# EAGLE board darwin-upper-panel (EAGLE 9.5.2), part 1 of 2
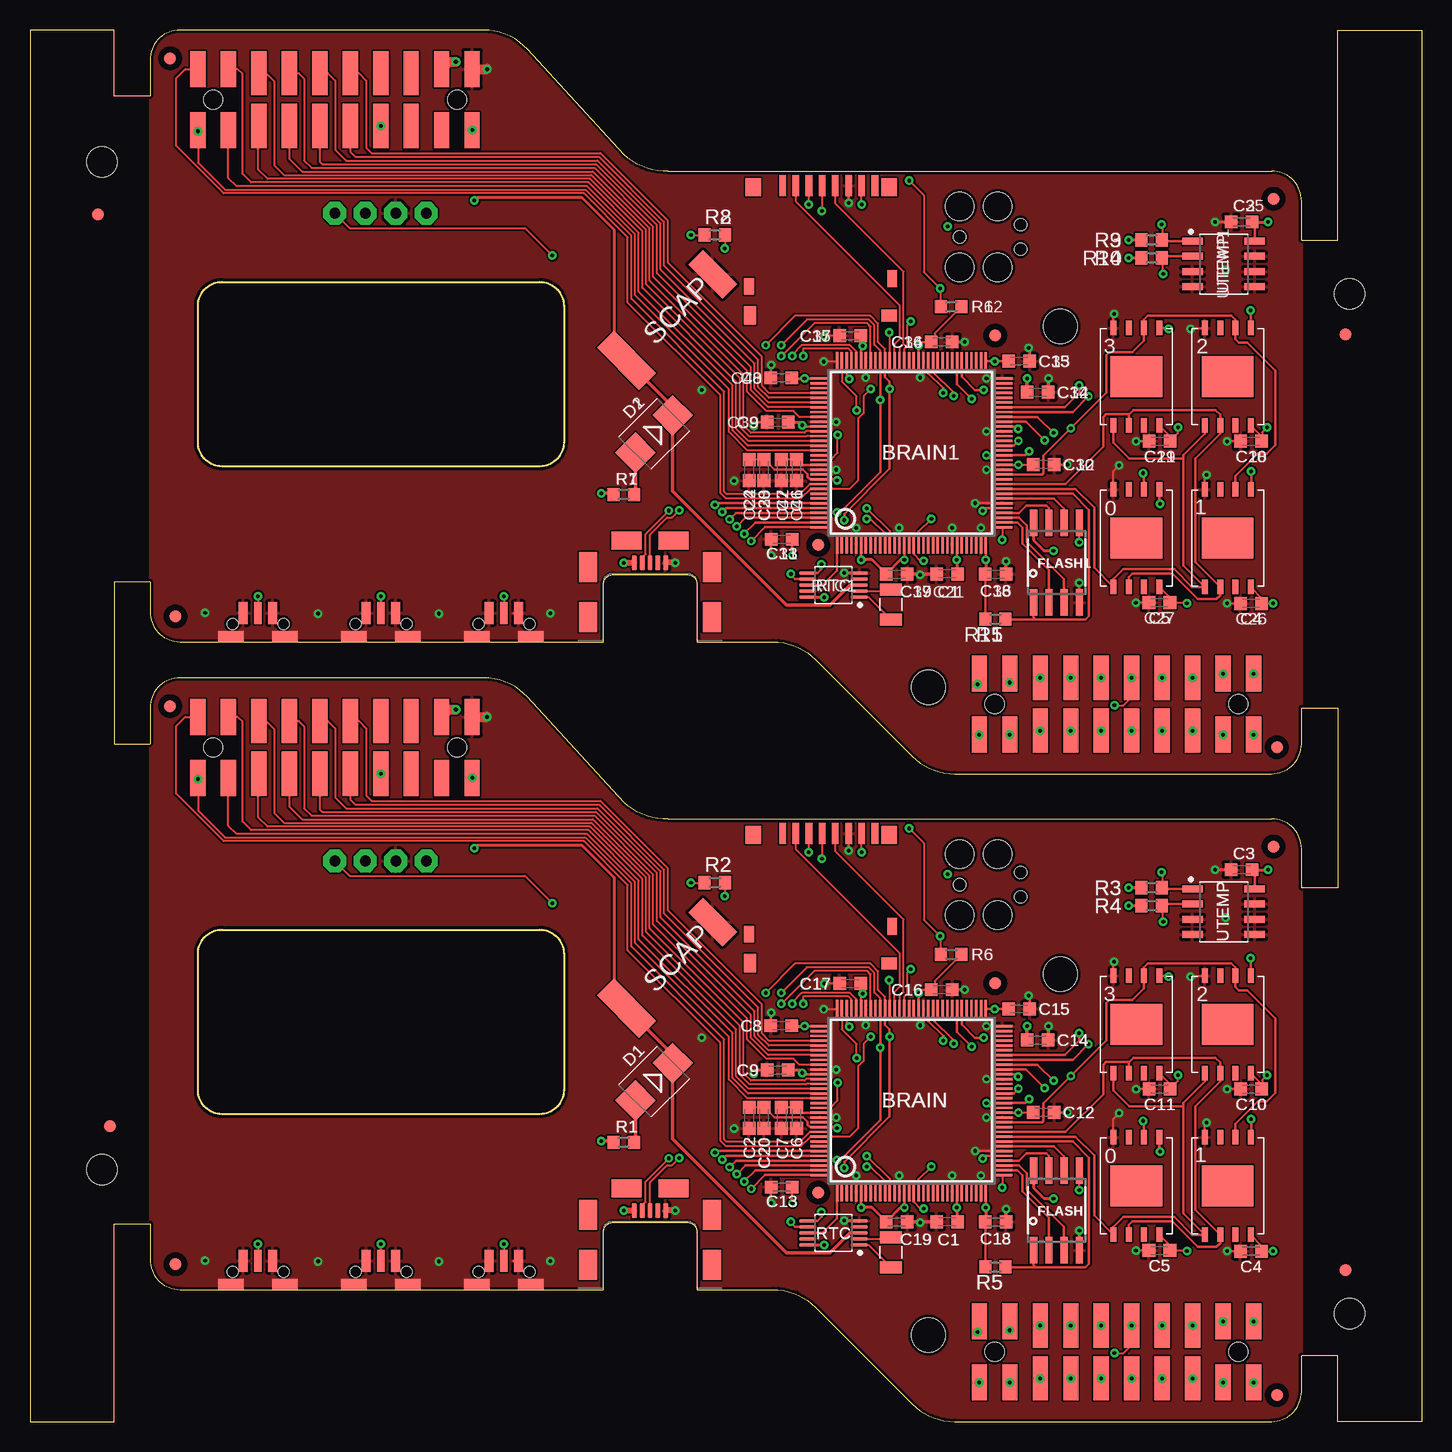
[diagram p0: board, top side]
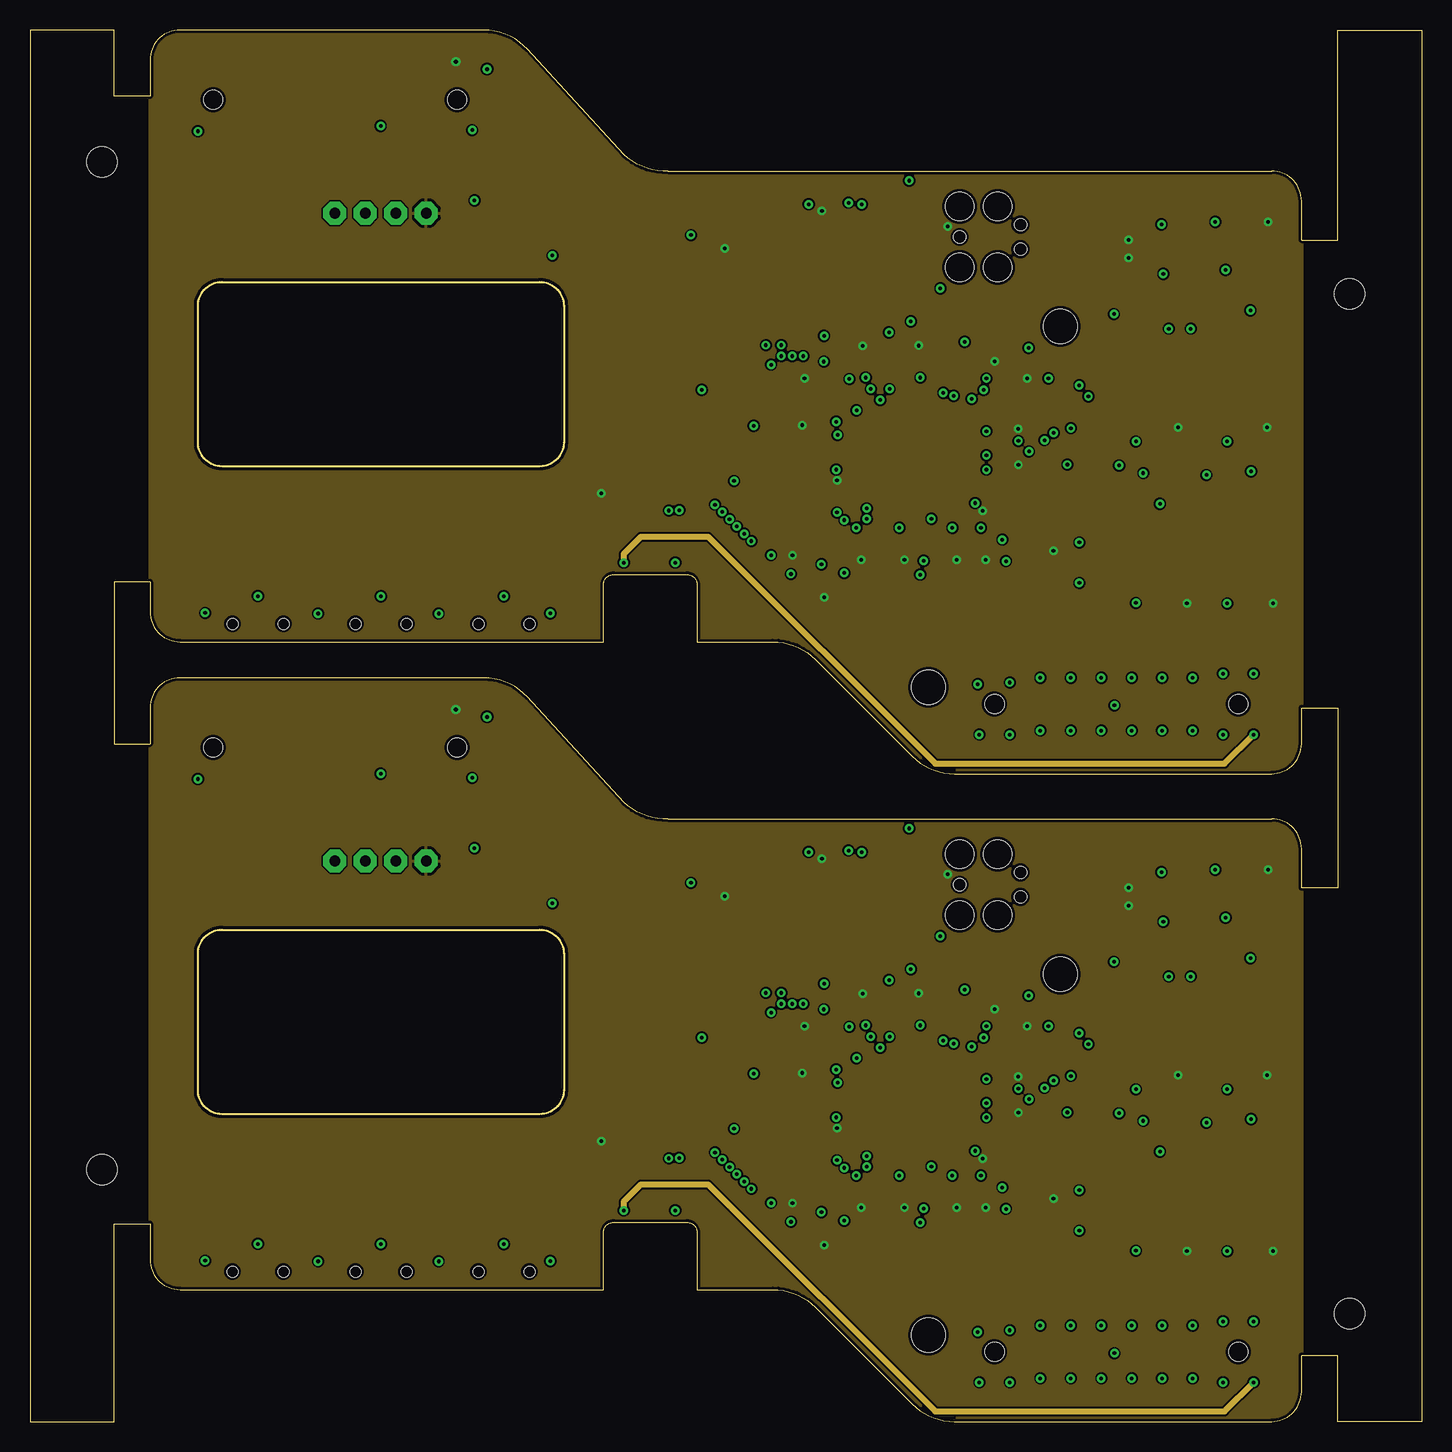
[diagram p1: board, inner layer Route2]
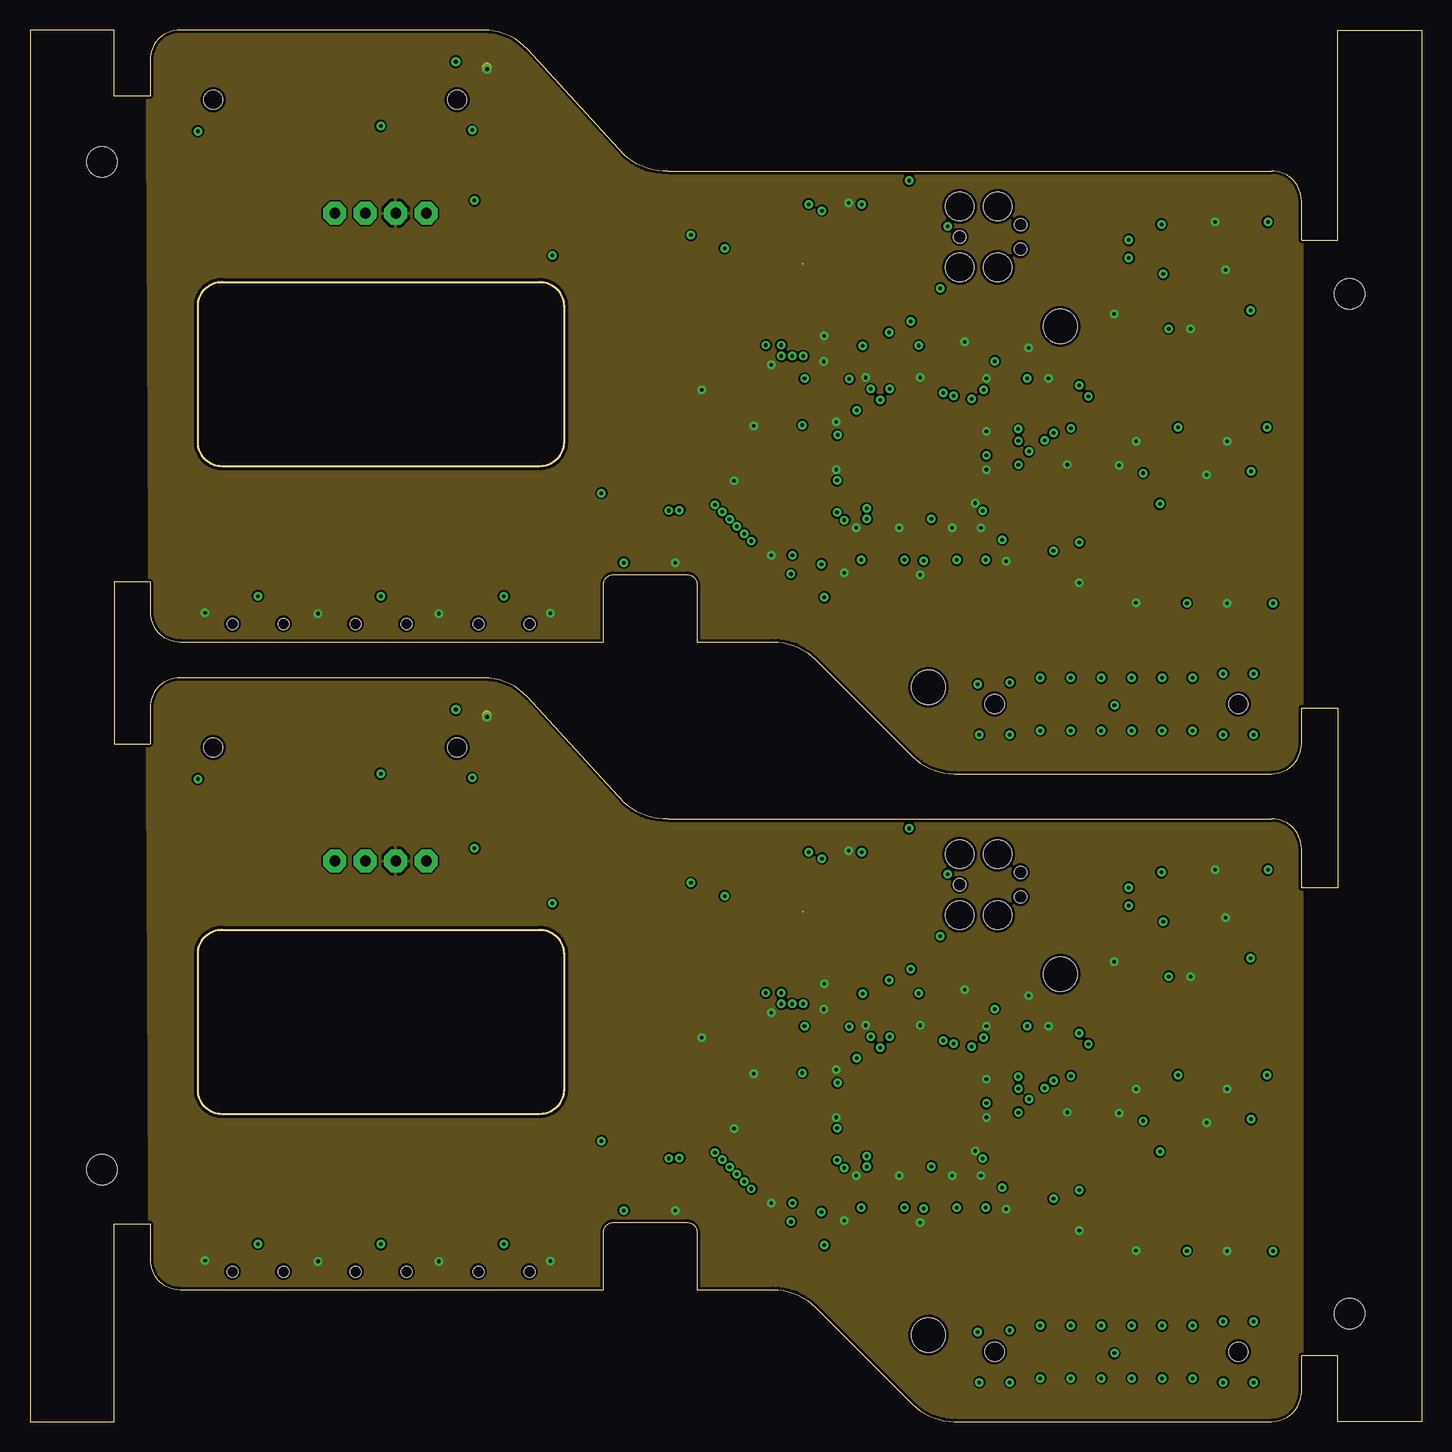
[diagram p2: board, inner layer Route15]
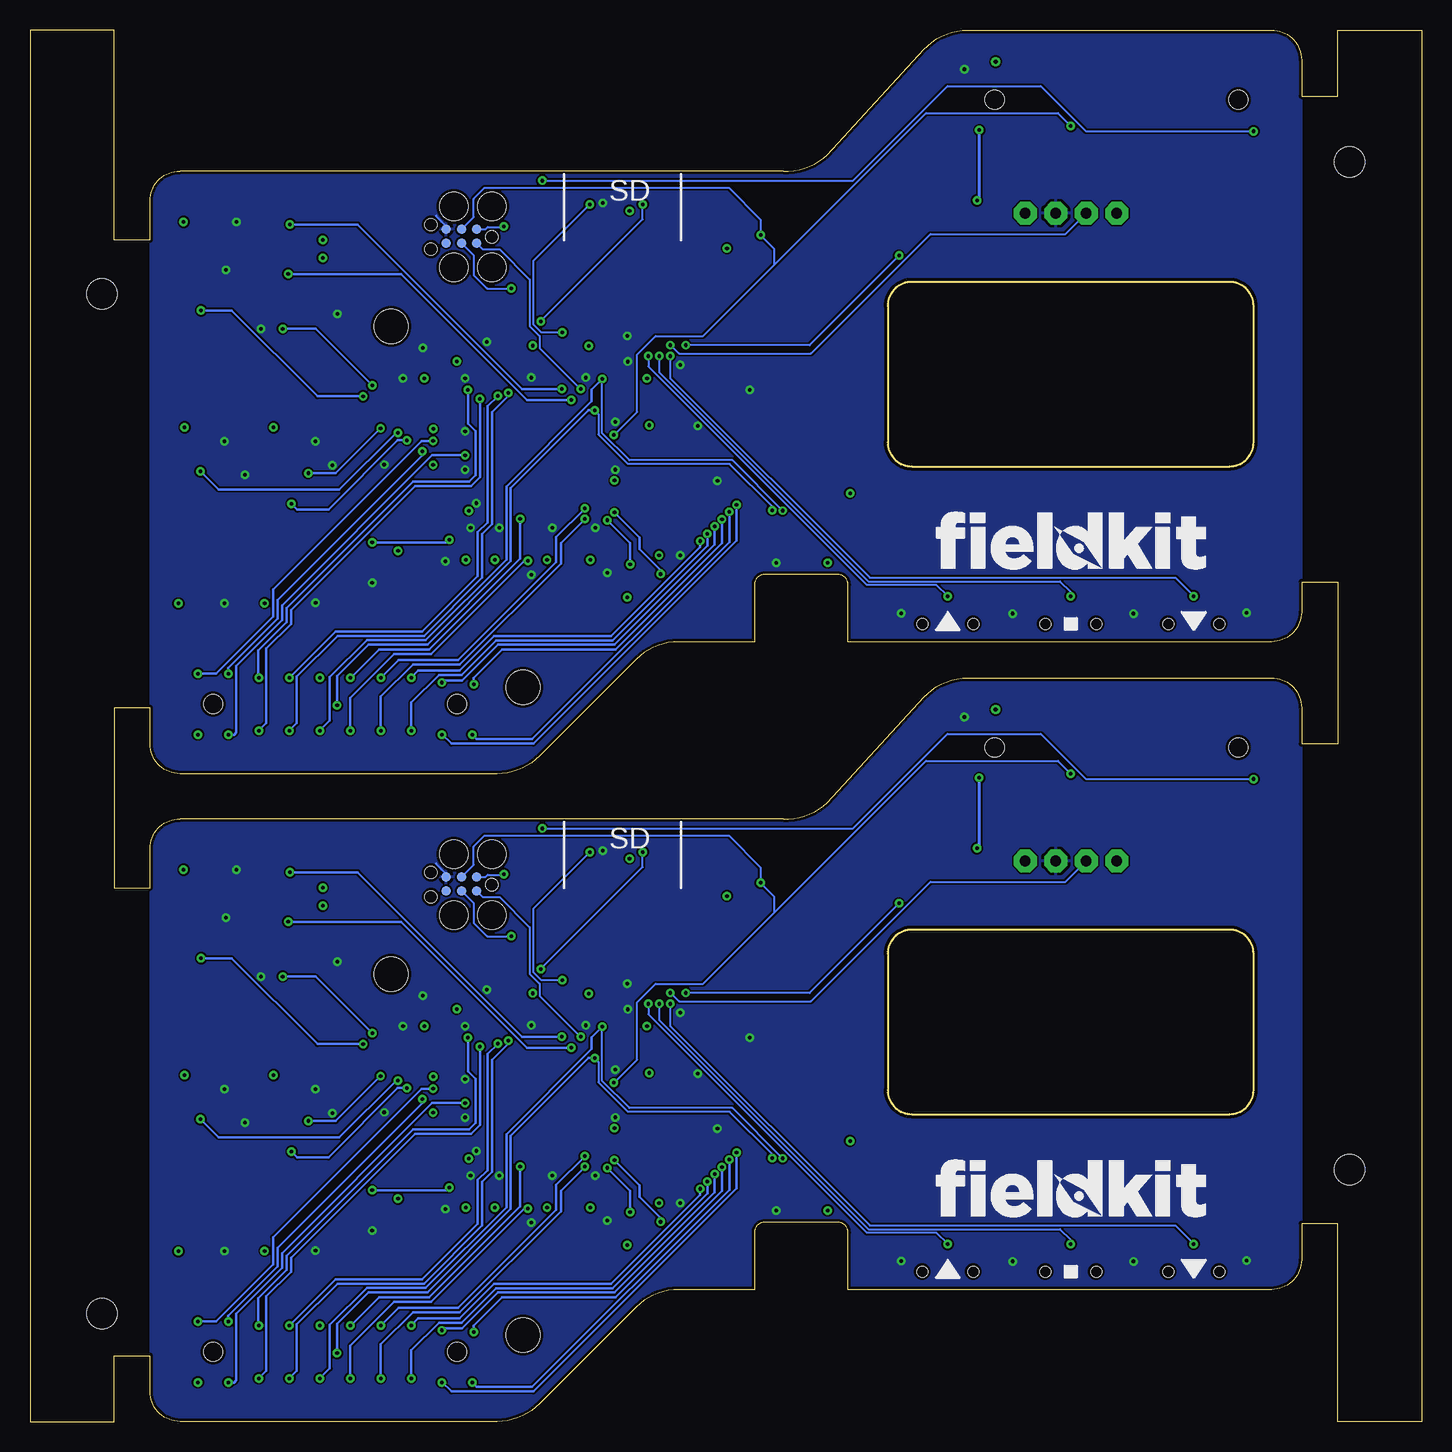
[diagram p3: board, bottom side, seen from below]

Size 116 x 116 mm. Coordinates in mm from the lower left corner, seen from the top.
Outline: 10,13.5 arc90 12.5,11 47.81,11 47.81,15.76 arc-90 48.66,16.61 54.75,16.61 arc-90 55.6,15.76 55.6,11 61.93,11 arc-45 65.46,9.54 73.54,1.46 arc45 77.07,0 103.5,0 arc90 106,2.5 106,5.5 109,5.5 109,0 116,0 116,116 109,116 109,98.5 106,98.5 106,101.75 arc90 103.5,104.25 53.2,104.25 arc-47 49.51,105.62 41.49,114.38 arc47 37.8,116 12.5,116 arc90 10,113.5 10,110.5 7,110.5 7,116 0,116 0,0 7,0 7,16.5 10,16.5 10,13.5
Outline: 106,47.75 arc90 103.5,50.25 53.2,50.25 arc-47 49.51,51.62 41.49,60.38 arc47 37.8,62 12.5,62 arc90 10,59.5 10,56.5 7,56.5 7,70 10,70 10,67.5 arc90 12.5,65 47.81,65 47.81,69.76 arc-90 48.66,70.61 54.75,70.61 arc-90 55.6,69.76 55.6,65 61.93,65 arc-45 65.46,63.54 73.54,55.46 arc45 77.07,54 103.5,54 arc90 106,56.5 106,59.5 109,59.5 109,44.5 106,44.5 106,47.75
Outline: 42.5,41 arc-90 44.5,39 44.5,27.62 arc-90 42.5,25.62 16,25.62 arc-90 14,27.62 14,39 arc-90 16,41 42.5,41
Outline: 42.5,95 arc-90 44.5,93 44.5,81.62 arc-90 42.5,79.62 16,79.62 arc-90 14,81.62 14,93 arc-90 16,95 42.5,95
Copper layers (1+2*15+16): Top 0.035mm / dielectric 1.5mm / Route2 0.035mm / dielectric 0.15mm / Route15 0.035mm / dielectric 0.2mm / Bottom 0.035mm
Design rules "working": minimum track width 6mil, minimum drill 0.3mm, track to track 6mil, track to pad 6mil, pad to pad 6mil, via to via 6mil, smd to smd 6mil, copper to edge 10mil, drill to drill 6mil, minimum pad ring 10mil, minimum via ring 8mil, stop-mask expansion 4mil, vias tented up to drill 0.31mm, thermal gap 10mil
Holes 2.54 mm at 6,105 110,94 6,21 110,9
Holes 2.84 mm at 85.9,37.3 74.9,7.2 85.9,91.3 74.9,61.2

## Footprints (pad centres in the part's own frame; a part is rotated, then mirrored left to right if it is on the bottom)
SQFP-S-14X14-128 = smd 0.2 x 1.6: 1 -6.2,-7.6; 2 -5.8,-7.6; 3 -5.4,-7.6; 4 -5,-7.6; 5 -4.6,-7.6; 6 -4.2,-7.6; 7 -3.8,-7.6; 8 -3.4,-7.6; 9 -3,-7.6; 10 -2.6,-7.6; 11 -2.2,-7.6; 12 -1.8,-7.6; 13 -1.4,-7.6; 14 -1,-7.6; 15 -0.6,-7.6; 16 -0.2,-7.6; 17 0.2,-7.6; 18 0.6,-7.6; 19 1,-7.6; 20 1.4,-7.6; 21 1.8,-7.6; 22 2.2,-7.6; 23 2.6,-7.6; 24 3,-7.6; 25 3.4,-7.6; 26 3.8,-7.6; 27 4.2,-7.6; 28 4.6,-7.6; 29 5,-7.6; 30 5.4,-7.6; 31 5.8,-7.6; 32 6.2,-7.6; 65 6.2,7.6; 66 5.8,7.6; 67 5.4,7.6; 68 5,7.6; 69 4.6,7.6; 70 4.2,7.6; 71 3.8,7.6; 72 3.4,7.6; 73 3,7.6; 74 2.6,7.6; 75 2.2,7.6; 76 1.8,7.6; 77 1.4,7.6; 78 1,7.6; 79 0.6,7.6; 80 0.2,7.6; 81 -0.2,7.6; 82 -0.6,7.6; 83 -1,7.6; 84 -1.4,7.6; 85 -1.8,7.6; 86 -2.2,7.6; 87 -2.6,7.6; 88 -3,7.6; 89 -3.4,7.6; 90 -3.8,7.6; 91 -4.2,7.6; 92 -4.6,7.6; 93 -5,7.6; 94 -5.4,7.6; 95 -5.8,7.6; 96 -6.2,7.6 | smd 1.6 x 0.2: 33 7.6,-6.2; 34 7.6,-5.8; 35 7.6,-5.4; 36 7.6,-5; 37 7.6,-4.6; 38 7.6,-4.2; 39 7.6,-3.8; 40 7.6,-3.4; 41 7.6,-3; 42 7.6,-2.6; 43 7.6,-2.2; 44 7.6,-1.8; 45 7.6,-1.4; 46 7.6,-1; 47 7.6,-0.6; 48 7.6,-0.2; 49 7.6,0.2; 50 7.6,0.6; 51 7.6,1; 52 7.6,1.4; 53 7.6,1.8; 54 7.6,2.2; 55 7.6,2.6; 56 7.6,3; 57 7.6,3.4; 58 7.6,3.8; 59 7.6,4.2; 60 7.6,4.6; 61 7.6,5; 62 7.6,5.4; 63 7.6,5.8; 64 7.6,6.2; 97 -7.6,6.2; 98 -7.6,5.8; 99 -7.6,5.4; 100 -7.6,5; 101 -7.6,4.6; 102 -7.6,4.2; 103 -7.6,3.8; 104 -7.6,3.4; 105 -7.6,3; 106 -7.6,2.6; 107 -7.6,2.2; 108 -7.6,1.8; 109 -7.6,1.4; 110 -7.6,1; 111 -7.6,0.6; 112 -7.6,0.2; 113 -7.6,-0.2; 114 -7.6,-0.6; 115 -7.6,-1; 116 -7.6,-1.4; 117 -7.6,-1.8; 118 -7.6,-2.2; 119 -7.6,-2.6; 120 -7.6,-3; 121 -7.6,-3.4; 122 -7.6,-3.8; 123 -7.6,-4.2; 124 -7.6,-4.6; 125 -7.6,-5; 126 -7.6,-5.4; 127 -7.6,-5.8; 128 -7.6,-6.2
SKRTLAE010 = smd 0.75 x 1.8: A -1.225,0.9; A2 1.225,0.9 | smd 0.6 x 1.8: B 0,0.9 | smd 2.1 x 0.9: TAB -2.25,-1.05; TAB2 2.25,-1.05 | hole 0.9: -2.125,0; 2.125,0
C0603K = smd 1.05 x 1.08: 1 -0.875,0; 2 0.875,0
SUPERCAP = smd 5 x 2: + 0,5.15 | smd 4 x 1.7: - 0,-5
SMB = smd 2.4 x 2.4: A 2.2,0; C -2.2,0
FIDUCIAL_1MM = smd 1 x 1: 1 0,0
SOIC8_208MIL = smd 0.6 x 2.2: 1 -1.905,-3.315; 2 -0.635,-3.315; 3 0.635,-3.315; 4 1.905,-3.315; 5 1.905,3.315; 6 0.635,3.315; 7 -0.635,3.315; 8 -1.905,3.315
TC2030-IDC = smd 0.787 x 0.787: GND 3.81,-0.635; NRESET 2.54,-0.635; SWCLK/TCK 2.54,0.508; SWDIO/TMS 1.27,0.508; SWO/TDO 3.81,0.508; VCC 1.27,-0.635 | hole 0.991: 0,0; 5.08,1.016; 5.08,-1.016 | hole 2.375: 0,2.54; 0,-2.54; 3.175,2.54; 3.175,-2.54
20PH-F = smd 3 x 1.27: PIN1 -0.34,0; PIN2 -0.34,-2.54; PIN9 -0.34,-20.32; PIN10 -0.34,-22.86; PIN11 4.74,-22.86; PIN12 4.74,-20.32; PIN19 4.74,-2.54; PIN20 4.74,0 | smd 3.68 x 1.27: PIN3 0,-5.08; PIN4 0,-7.62; PIN5 0,-10.16; PIN6 0,-12.7; PIN7 0,-15.24; PIN8 0,-17.78; PIN13 4.4,-17.78; PIN14 4.4,-15.24; PIN15 4.4,-12.7; PIN16 4.4,-10.16; PIN17 4.4,-7.62; PIN18 4.4,-5.08 | hole 1.58: 2.2,-1.27; 2.2,-21.59
R0603 = smd 1 x 1.1: 1 -0.85,0; 2 0.85,0
SOP50P490X110-10 = smd 1.438 x 0.297: 1 -2.145,1; 2 -2.145,0.5; 3 -2.145,0; 4 -2.145,-0.5; 5 -2.145,-1; 6 2.145,-1; 7 2.145,-0.5; 8 2.145,0; 9 2.145,0.5; 10 2.145,1
SCREEN = drill 0.889 pad 1.905 octagon: P0 13.97,1.27; P1 16.51,1.27; P2 19.05,1.27; P3 21.59,1.27
DM3D-SF = smd 0.55 x 1.75: CD/DAT3 6.6,-0.875; CLK 3.3,-0.875; CMD 5.5,-0.875; DAT0 1.1,-0.875; DAT1 0,-0.875; DAT2 7.7,-0.875; VDD 4.4,-0.875; VSS 2.2,-0.875 | smd 1.3 x 1.5: PAD1 -1.2,-0.75; PAD2 10.15,-0.75 | smd 0.8 x 1.4: PAD3 10.5,7.5; PAD6 -1.45,6.85 | smd 1 x 1.55: PAD4 10.4,9.925 | smd 1.3 x 1: PAD5 -1.2,9.925
WSON8 = smd 0.5 x 1.2: P$1 -1.905,-4.06; P$2 -0.635,-4.06; P$3 0.635,-4.06; P$4 1.905,-4.06; P$5 1.905,4.06; P$6 0.635,4.06; P$7 -0.635,4.06; P$8 -1.905,4.06 | smd 4.3 x 3.4: PAD 0,0
ABS07W = smd 1 x 1.8: P$1 -1.25,0; P$2 1.25,0
MOELX-47491-0001 = smd 1.25 x 0.4: D+ 0.875,0; D- 0.875,0.65; GND 0.875,-1.3; ID 0.875,-0.65; VCC 0.875,1.3 | smd 2.5 x 1.5: PAD1 -3.65,5.15; PAD2 0.55,5.15; PAD5 0.55,-5.15; PAD6 -3.65,-5.15 | smd 1.5 x 2.5: PAD3 2.75,1.95; PAD4 2.75,-1.95
SO8 = smd 1.746 x 0.592: 1 -2.585,1.905; 2 -2.585,0.635; 3 -2.585,-0.635; 4 -2.585,-1.905; 5 2.585,-1.905; 6 2.585,-0.635; 7 2.585,0.635; 8 2.585,1.905

## Placement (x,y rotation side)
BRAIN  SAMD51PXXA  [SQFP-S-14X14-128]  73.48,26.75 0 top
BRAIN1  SAMD51PXXA  [SQFP-S-14X14-128]  73.48,80.75 0 top
BTN1  SKRTLAE010  [SKRTLAE010]  19,12.5 0 top
BTN2  SKRTLAE010  [SKRTLAE010]  29.25,12.5 0 top
BTN3  SKRTLAE010  [SKRTLAE010]  39.5,12.5 0 top
BTN4  SKRTLAE010  [SKRTLAE010]  19,66.5 0 top
BTN5  SKRTLAE010  [SKRTLAE010]  29.25,66.5 0 top
BTN6  SKRTLAE010  [SKRTLAE010]  39.5,66.5 0 top
C1  .1uf  [C0603K]  76.46,16.66 180 top
C2  .1uf  [C0603K]  59.96,25.31 270 top
C3  .1uf  [C0603K]  101,46 180 top
C4  .1uf  [C0603K]  101.79,14.2 180 top
C5  .1uf  [C0603K]  94.15,14.26 180 top
C6  .1uf  [C0603K]  63.9,25.31 270 top
C7  4.7uf  [C0603K]  62.66,25.31 270 top
C8  .1uf  [C0603K]  62.63,33 180 top
C9  .1uf  [C0603K]  62.33,29.3 180 top
C10  .1uf  [C0603K]  101.8,27.72 180 top
C11  .1uf  [C0603K]  94.16,27.72 180 top
C12  .1uf  [C0603K]  84.5,25.78 0 top
C13  .1uf  [C0603K]  62.66,19.54 180 top
C14  .1uf  [C0603K]  84,31.8 0 top
C15  .1uf  [C0603K]  82.46,34.4 0 top
C16  .1uf  [C0603K]  76,36 0 top
C17  .1uf  [C0603K]  68.37,36.51 180 top
C18  .1uf  [C0603K]  80.49,16.64 0 top
C19  .1uf  [C0603K]  72.25,16.64 0 top
C20  .1uf  [C0603K]  61.19,25.31 270 top
C21  .1uf  [C0603K]  76.46,70.66 180 top
C22  .2f  [SUPERCAP]  53.37,92.09 135 top
C23  .2f  [SUPERCAP]  53.37,38.09 135 top
C24  .1uf  [C0603K]  59.96,79.31 270 top
C25  .1uf  [C0603K]  101,100 180 top
C26  .1uf  [C0603K]  101.79,68.2 180 top
C27  .1uf  [C0603K]  94.15,68.26 180 top
C28  .1uf  [C0603K]  101.8,81.72 180 top
C29  .1uf  [C0603K]  94.16,81.72 180 top
C30  .1uf  [C0603K]  84.5,79.78 0 top
C31  .1uf  [C0603K]  62.66,73.54 180 top
C32  .1uf  [C0603K]  84,85.8 0 top
C33  .1uf  [C0603K]  82.46,88.4 0 top
C34  .1uf  [C0603K]  76,90 0 top
C35  .1uf  [C0603K]  68.37,90.51 180 top
C36  .1uf  [C0603K]  80.49,70.64 0 top
C37  .1uf  [C0603K]  72.25,70.64 0 top
C38  .1uf  [C0603K]  61.19,79.31 270 top
C39  .1uf  [C0603K]  62.33,83.3 180 top
C40  .1uf  [C0603K]  62.63,87 180 top
C41  .1uf  [C0603K]  63.9,79.31 270 top
C42  4.7uf  [C0603K]  62.66,79.31 270 top
D1  VS-10BQ015HM3/5BT  [SMB]  52.02,28.33 225 top
D2  VS-10BQ015HM3/5BT  [SMB]  52.02,82.33 225 top
FID1  FIDUCIAL_1MM  [FIDUCIAL_1MM]  12.13,13.11 0 top
FID2  FIDUCIAL_1MM  [FIDUCIAL_1MM]  11.69,59.64 0 top
FID3  FIDUCIAL_1MM  [FIDUCIAL_1MM]  103.66,47.93 0 top
FID4  FIDUCIAL_1MM  [FIDUCIAL_1MM]  103.94,2.2 0 top
FID5  FIDUCIAL_1MM  [FIDUCIAL_1MM]  80.47,36.53 0 top
FID6  FIDUCIAL_1MM  [FIDUCIAL_1MM]  65.71,19.08 0 top
FID7  FIDUCIAL_1MM  [FIDUCIAL_1MM]  12.13,67.11 0 top
FID8  FIDUCIAL_1MM  [FIDUCIAL_1MM]  11.69,113.64 0 top
FID9  FIDUCIAL_1MM  [FIDUCIAL_1MM]  103.66,101.93 0 top
FID10  FIDUCIAL_1MM  [FIDUCIAL_1MM]  103.94,56.2 0 top
FID11  FIDUCIAL_1MM  [FIDUCIAL_1MM]  80.47,90.53 0 top
FID12  FIDUCIAL_1MM  [FIDUCIAL_1MM]  65.71,73.08 0 top
FID13  FIDUCIAL_1MM  [FIDUCIAL_1MM]  6.69,24.64 0 top
FID14  FIDUCIAL_1MM  [FIDUCIAL_1MM]  109.69,90.64 0 top
FID15  FIDUCIAL_1MM  [FIDUCIAL_1MM]  5.69,100.64 0 top
FID16  FIDUCIAL_1MM  [FIDUCIAL_1MM]  109.69,12.64 0 top
FLASH  [SOIC8_208MIL]  85.57,17.61 0 top
FLASH1  [SOIC8_208MIL]  85.57,71.61 0 top
J1  TAG-CONNECT  [TC2030-IDC]  77.5,44.75 180 bottom
J2  TAG-CONNECT  [TC2030-IDC]  77.5,98.75 180 bottom
LOWER  MOLEX-15-91-2200F  [20PH-F]  102,8 270 top
LOWER1  MOLEX-15-91-2200F  [20PH-F]  102,62 270 top
R1  2k  [R0603]  49.5,23.28 0 top
R2  10k  [R0603]  57.1,44.92 0 top
R3  4.7k  [R0603]  93.5,44.5 180 top
R4  4.7k  [R0603]  93.5,43 180 top
R5  10K  [R0603]  80.48,12.89 180 top
R6  10k  [R0603]  76.8,38.93 0 top
R7  2k  [R0603]  49.5,77.28 0 top
R8  10k  [R0603]  57.1,98.92 0 top
R9  4.7k  [R0603]  93.5,98.5 180 top
R10  4.7k  [R0603]  93.5,97 180 top
R11  10K  [R0603]  80.48,66.89 180 top
R12  10k  [R0603]  76.8,92.93 0 top
RTC  PCF85363ATT  [SOP50P490X110-10]  66.98,15.73 180 top
RTC1  PCF85363ATT  [SOP50P490X110-10]  66.98,69.73 180 top
SCREEN  SCREEN  [SCREEN]  47,48 180 top
SCREEN1  SCREEN  [SCREEN]  47,102 180 top
SD  DM3D-SF  [DM3D-SF]  70.44,48.13 180 top
SD1  DM3D-SF  [DM3D-SF]  70.44,102.13 180 top
U1  TC58CVG1S3HRAIG  [WSON8]  92.23,19.64 180 top
U2  TC58CVG1S3HRAIG  [WSON8]  99.85,19.64 180 top
U3  TC58CVG1S3HRAIG  [WSON8]  99.85,33.1 180 top
U4  TC58CVG1S3HRAIG  [WSON8]  92.23,33.1 180 top
U5  TC58CVG1S3HRAIG  [WSON8]  92.23,73.64 180 top
U6  TC58CVG1S3HRAIG  [WSON8]  99.85,73.64 180 top
U7  TC58CVG1S3HRAIG  [WSON8]  99.85,87.1 180 top
U8  TC58CVG1S3HRAIG  [WSON8]  92.23,87.1 180 top
U$1  ABS07W  [ABS07W]  71.77,68.09 270 top
U$14  ABS07W  [ABS07W]  71.77,14.09 270 top
UPPER  MOLEX-15-91-2200F  [20PH-F]  14,54 90 top
UPPER1  MOLEX-15-91-2200F  [20PH-F]  14,108 90 top
USB  MOLEX-47491-0001  [MOELX-47491-0001]  51.69,16.7 90 top
USB1  MOLEX-47491-0001  [MOELX-47491-0001]  51.69,70.7 90 top
UTEMP  PCT2075  [SO8]  99.5,42.5 0 top
UTEMP1  PCT2075  [SO8]  99.5,96.5 0 top

## Library data of the parts
BRAIN BRAIN1 FLASH FLASH1 = microbuilder
BTN1-BTN6 C22 C23 J1 J2 LOWER LOWER1 RTC RTC1 SCREEN SCREEN1 SD SD1 U1-U8 U$1 U$14 UPPER UPPER1 USB USB1 UTEMP UTEMP1 = Conservify
C1-C21 C24-C42 = rcl; SPICEPREFIX: C
D1 D2 = diode
FID1-FID16 = microbuilder; BOM: EXCLUDE
R1-R12 = rcl; SPICEPREFIX: R

## Nets
3V1: BRAIN1.6 BRAIN1.15 BRAIN1.26 BRAIN1.32 BRAIN1.37 BRAIN1.46 BRAIN1.54 BRAIN1.65 BRAIN1.79 BRAIN1.91 BRAIN1.97 BRAIN1.107 BRAIN1.118 C21.1 C24.1 C25.1 C26.1 C27.1 C28.1 C29.1 C30.1 C31.1 C32.1 C33.1 C34.1 C35.1 C36.1 C37.1 C38.1 C39.1 C40.1 FLASH1.8 J2.VCC R7.1 R8.2 R9.2 R10.2 R11.2 R12.2 RTC1.10 SCREEN1.P0 SD1.VDD U5.P$8 U6.P$8 U7.P$8 U8.P$8 UPPER1.PIN12 UTEMP1.8
3V3: BRAIN.6 BRAIN.15 BRAIN.26 BRAIN.32 BRAIN.37 BRAIN.46 BRAIN.54 BRAIN.65 BRAIN.79 BRAIN.91 BRAIN.97 BRAIN.107 BRAIN.118 C1.1 C2.1 C3.1 C4.1 C5.1 C8.1 C9.1 C10.1 C11.1 C12.1 C13.1 C14.1 C15.1 C16.1 C17.1 C18.1 C19.1 C20.1 FLASH.8 J1.VCC R1.1 R2.2 R3.2 R4.2 R5.2 R6.2 RTC.10 SCREEN.P0 SD.VDD U1.P$8 U2.P$8 U3.P$8 U4.P$8 UPPER.PIN12 UTEMP.8
BUT1: BRAIN.89 BTN1.B
BUT2: BRAIN.92 BTN2.B
BUT3: BRAIN.93 BTN3.B
BUT4: BRAIN1.89 BTN4.B
BUT5: BRAIN1.92 BTN5.B
BUT6: BRAIN1.93 BTN6.B
CLOCK: BRAIN.1 RTC.8
CLOCK1: BRAIN1.1 RTC1.8
CORE_SCL: BRAIN.87 R4.1 RTC.7 SCREEN.P2 UTEMP.2
CORE_SCL1: BRAIN1.87 R10.1 RTC1.7 SCREEN1.P2 UTEMP1.2
CORE_SDA: BRAIN.86 R3.1 RTC.6 SCREEN.P3 UTEMP.1
CORE_SDA1: BRAIN1.86 R9.1 RTC1.6 SCREEN1.P3 UTEMP1.1
D+: BRAIN.95 LOWER.PIN5 USB.D+
D+1: BRAIN1.95 LOWER1.PIN5 USB1.D+
D-: BRAIN.94 LOWER.PIN16 USB.D-
D-1: BRAIN1.94 LOWER1.PIN16 USB1.D-
EEPROM_PROT: BRAIN.126 LOWER.PIN9
EEPROM_PROT1: BRAIN1.126 LOWER1.PIN9
FLASH_MISO: BRAIN.44 U1.P$2 U2.P$2 U3.P$2 U4.P$2
FLASH_MISO1: BRAIN1.44 U5.P$2 U6.P$2 U7.P$2 U8.P$2
FLASH_MOSI: BRAIN.41 U1.P$5 U2.P$5 U3.P$5 U4.P$5
FLASH_MOSI1: BRAIN1.41 U5.P$5 U6.P$5 U7.P$5 U8.P$5
FLASH_S0: BRAIN.55 U1.P$1
FLASH_S1: BRAIN.56 U2.P$1
FLASH_S2: BRAIN.57 U3.P$1
FLASH_S3: BRAIN.58 U4.P$1
FLASH_S4: BRAIN1.55 U5.P$1
FLASH_S5: BRAIN1.56 U6.P$1
FLASH_S6: BRAIN1.57 U7.P$1
FLASH_S7: BRAIN1.58 U8.P$1
FLASH_SCK: BRAIN.42 U1.P$6 U2.P$6 U3.P$6 U4.P$6
FLASH_SCK1: BRAIN1.42 U5.P$6 U6.P$6 U7.P$6 U8.P$6
GND: BRAIN.5 BRAIN.14 BRAIN.25 BRAIN.31 BRAIN.38 BRAIN.45 BRAIN.53 BRAIN.64 BRAIN.78 BRAIN.90 BRAIN.96 BRAIN.106 BRAIN.116 BTN1.A BTN1.A2 BTN1.TAB BTN1.TAB2 BTN2.A BTN2.A2 BTN2.TAB BTN2.TAB2 BTN3.A BTN3.A2 BTN3.TAB BTN3.TAB2 C1.2 C2.2 C3.2 C4.2 C5.2 C6.2 C7.2 C8.2 C9.2 C10.2 C11.2 C12.2 C13.2 C14.2 C15.2 C16.2 C17.2 C18.2 C19.2 C20.2 C23.- FLASH.4 J1.GND RTC.5 SCREEN.P1 SD.VSS U1.P$4 U2.P$4 U3.P$4 U4.P$4 UPPER.PIN11 USB.GND UTEMP.3 UTEMP.4 UTEMP.5 UTEMP.6 UTEMP.7
GND1: BRAIN1.5 BRAIN1.14 BRAIN1.25 BRAIN1.31 BRAIN1.38 BRAIN1.45 BRAIN1.53 BRAIN1.64 BRAIN1.78 BRAIN1.90 BRAIN1.96 BRAIN1.106 BRAIN1.116 BTN4.A BTN4.A2 BTN4.TAB BTN4.TAB2 BTN5.A BTN5.A2 BTN5.TAB BTN5.TAB2 BTN6.A BTN6.A2 BTN6.TAB BTN6.TAB2 C21.2 C22.- C24.2 C25.2 C26.2 C27.2 C28.2 C29.2 C30.2 C31.2 C32.2 C33.2 C34.2 C35.2 C36.2 C37.2 C38.2 C39.2 C40.2 C41.2 C42.2 FLASH1.4 J2.GND RTC1.5 SCREEN1.P1 SD1.VSS U5.P$4 U6.P$4 U7.P$4 U8.P$4 UPPER1.PIN11 USB1.GND UTEMP1.3 UTEMP1.4 UTEMP1.5 UTEMP1.6 UTEMP1.7
GPS_RX: BRAIN.101 UPPER.PIN6
GPS_RX1: BRAIN1.101 UPPER1.PIN6
GPS_TX: BRAIN.100 UPPER.PIN15
GPS_TX1: BRAIN1.100 UPPER1.PIN15
HOTSWAP_INT: BRAIN.128 LOWER.PIN8
HOTSWAP_INT1: BRAIN1.128 LOWER1.PIN8
MOD_G0: BRAIN.125 LOWER.PIN10
MOD_G1: BRAIN1.125 LOWER1.PIN10
MOD_G2: BRAIN.127 LOWER.PIN13
MOD_G3: BRAIN1.127 LOWER1.PIN13
MOD_G4: BRAIN.11 LOWER.PIN14
MOD_G5: BRAIN.12 LOWER.PIN7
MOD_G6: BRAIN.17 LOWER.PIN15
MOD_G7: BRAIN.18 LOWER.PIN6
MOD_G8: BRAIN.108 UPPER.PIN4
MOD_G9: BRAIN.109 UPPER.PIN18
MOD_G10: BRAIN.110 UPPER.PIN3
MOD_G11: BRAIN.111 UPPER.PIN19
MOD_G12: BRAIN.112 UPPER.PIN2
MOD_G13: BRAIN.123 LOWER.PIN12
MOD_G14: BRAIN.124 LOWER.PIN11
MOD_G15: BRAIN1.11 LOWER1.PIN14
MOD_G16: BRAIN1.12 LOWER1.PIN7
MOD_G17: BRAIN1.17 LOWER1.PIN15
MOD_G18: BRAIN1.18 LOWER1.PIN6
MOD_G19: BRAIN1.108 UPPER1.PIN4
MOD_G20: BRAIN1.109 UPPER1.PIN18
MOD_G21: BRAIN1.110 UPPER1.PIN3
MOD_G22: BRAIN1.111 UPPER1.PIN19
MOD_G23: BRAIN1.112 UPPER1.PIN2
MOD_G24: BRAIN1.123 LOWER1.PIN12
MOD_G25: BRAIN1.124 LOWER1.PIN11
MOD_MISO: BRAIN.50 LOWER.PIN1
MOD_MISO1: BRAIN1.50 LOWER1.PIN1
MOD_MOSI: BRAIN.47 LOWER.PIN19
MOD_MOSI1: BRAIN1.47 LOWER1.PIN19
MOD_SCK: BRAIN.48 LOWER.PIN2
MOD_SCK1: BRAIN1.48 LOWER1.PIN2
MOD_SCL: BRAIN.71 LOWER.PIN18
MOD_SCL1: BRAIN1.71 LOWER1.PIN18
MOD_SDA: BRAIN.70 LOWER.PIN3
MOD_SDA1: BRAIN1.70 LOWER1.PIN3
N$1: D2.A R7.2
N$2: D1.A R1.2
N$3: RTC.1 U$14.P$2
N$4: RTC.2 U$14.P$1
N$5: RTC1.1 U$1.P$2
N$6: BRAIN.115 C6.1 C7.1
N$7: RTC1.2 U$1.P$1
N$8: BRAIN1.115 C41.1 C42.1
QSPI_CS: BRAIN.40 FLASH.1 R5.1
QSPI_CS1: BRAIN1.40 FLASH1.1 R11.1
QSPI_IO0: BRAIN.33 FLASH.5
QSPI_IO1: BRAIN.34 FLASH.2
QSPI_IO2: BRAIN.35 FLASH.3
QSPI_IO3: BRAIN.36 FLASH.7
QSPI_IO4: BRAIN1.33 FLASH1.5
QSPI_IO5: BRAIN1.34 FLASH1.2
QSPI_IO6: BRAIN1.35 FLASH1.3
QSPI_IO7: BRAIN1.36 FLASH1.7
QSPI_SCK: BRAIN.39 FLASH.6
QSPI_SCK1: BRAIN1.39 FLASH1.6
RAD_SCL: BRAIN.77 LOWER.PIN17
RAD_SCL1: BRAIN1.77 LOWER1.PIN17
RAD_SDA: BRAIN.76 LOWER.PIN4
RAD_SDA1: BRAIN1.76 LOWER1.PIN4
RADIO_MISO: BRAIN.105 UPPER.PIN17
RADIO_MISO1: BRAIN1.105 UPPER1.PIN17
RADIO_MOSI: BRAIN.102 UPPER.PIN16
RADIO_MOSI1: BRAIN1.102 UPPER1.PIN16
RADIO_SCK: BRAIN.103 UPPER.PIN5
RADIO_SCK1: BRAIN1.103 UPPER1.PIN5
RESET: BRAIN.114 J1.NRESET R2.1 UPPER.PIN7
RESET1: BRAIN1.114 J2.NRESET R8.1 UPPER1.PIN7
SD_MISO: BRAIN.85 SD.DAT0
SD_MISO1: BRAIN1.85 SD1.DAT0
SD_MOSI: BRAIN.82 SD.CMD
SD_MOSI1: BRAIN1.82 SD1.CMD
SD_SCK: BRAIN.83 SD.CLK
SD_SCK1: BRAIN1.83 SD1.CLK
SD_SS: BRAIN.84 SD.CD/DAT3
SD_SS1: BRAIN1.84 SD1.CD/DAT3
SWCLK: BRAIN.119 J1.SWCLK/TCK R6.1 UPPER.PIN1
SWCLK1: BRAIN1.119 J2.SWCLK/TCK R12.1 UPPER1.PIN1
SWDIO: BRAIN.120 J1.SWDIO/TMS UPPER.PIN20
SWDIO1: BRAIN1.120 J2.SWDIO/TMS UPPER1.PIN20
SWO: J1.SWO/TDO
SWO1: J2.SWO/TDO
UPPER_PIN1: UPPER1.PIN8
UPPER_PIN2: UPPER1.PIN9
UPPER_PIN3: UPPER1.PIN13
UPPER_PIN4: UPPER1.PIN14
UPPER_PIN8: UPPER.PIN8
UPPER_PIN9: UPPER.PIN9
UPPER_PIN13: UPPER.PIN13
UPPER_PIN14: UPPER.PIN14
USB_HOSTEN: BRAIN.113
USB_HOSTEN1: BRAIN1.113
V1: LOWER1.PIN20 USB1.VCC
V5: LOWER.PIN20 USB.VCC
VBACKUP: C23.+ D1.C RTC.3 UPPER.PIN10
VBACKUP1: C22.+ D2.C RTC1.3 UPPER1.PIN10